# Altium PCB Copy of PCB1.PcbDoc
Units mil, origin at the board's own origin, x right, y up, seen from the top; angles counter-clockwise.
Board outline 3215 x 3375 mil, 2 copper layers (Top Layer, Bottom Layer); 21 components, 30 nets, 101 pads, 4 vias.
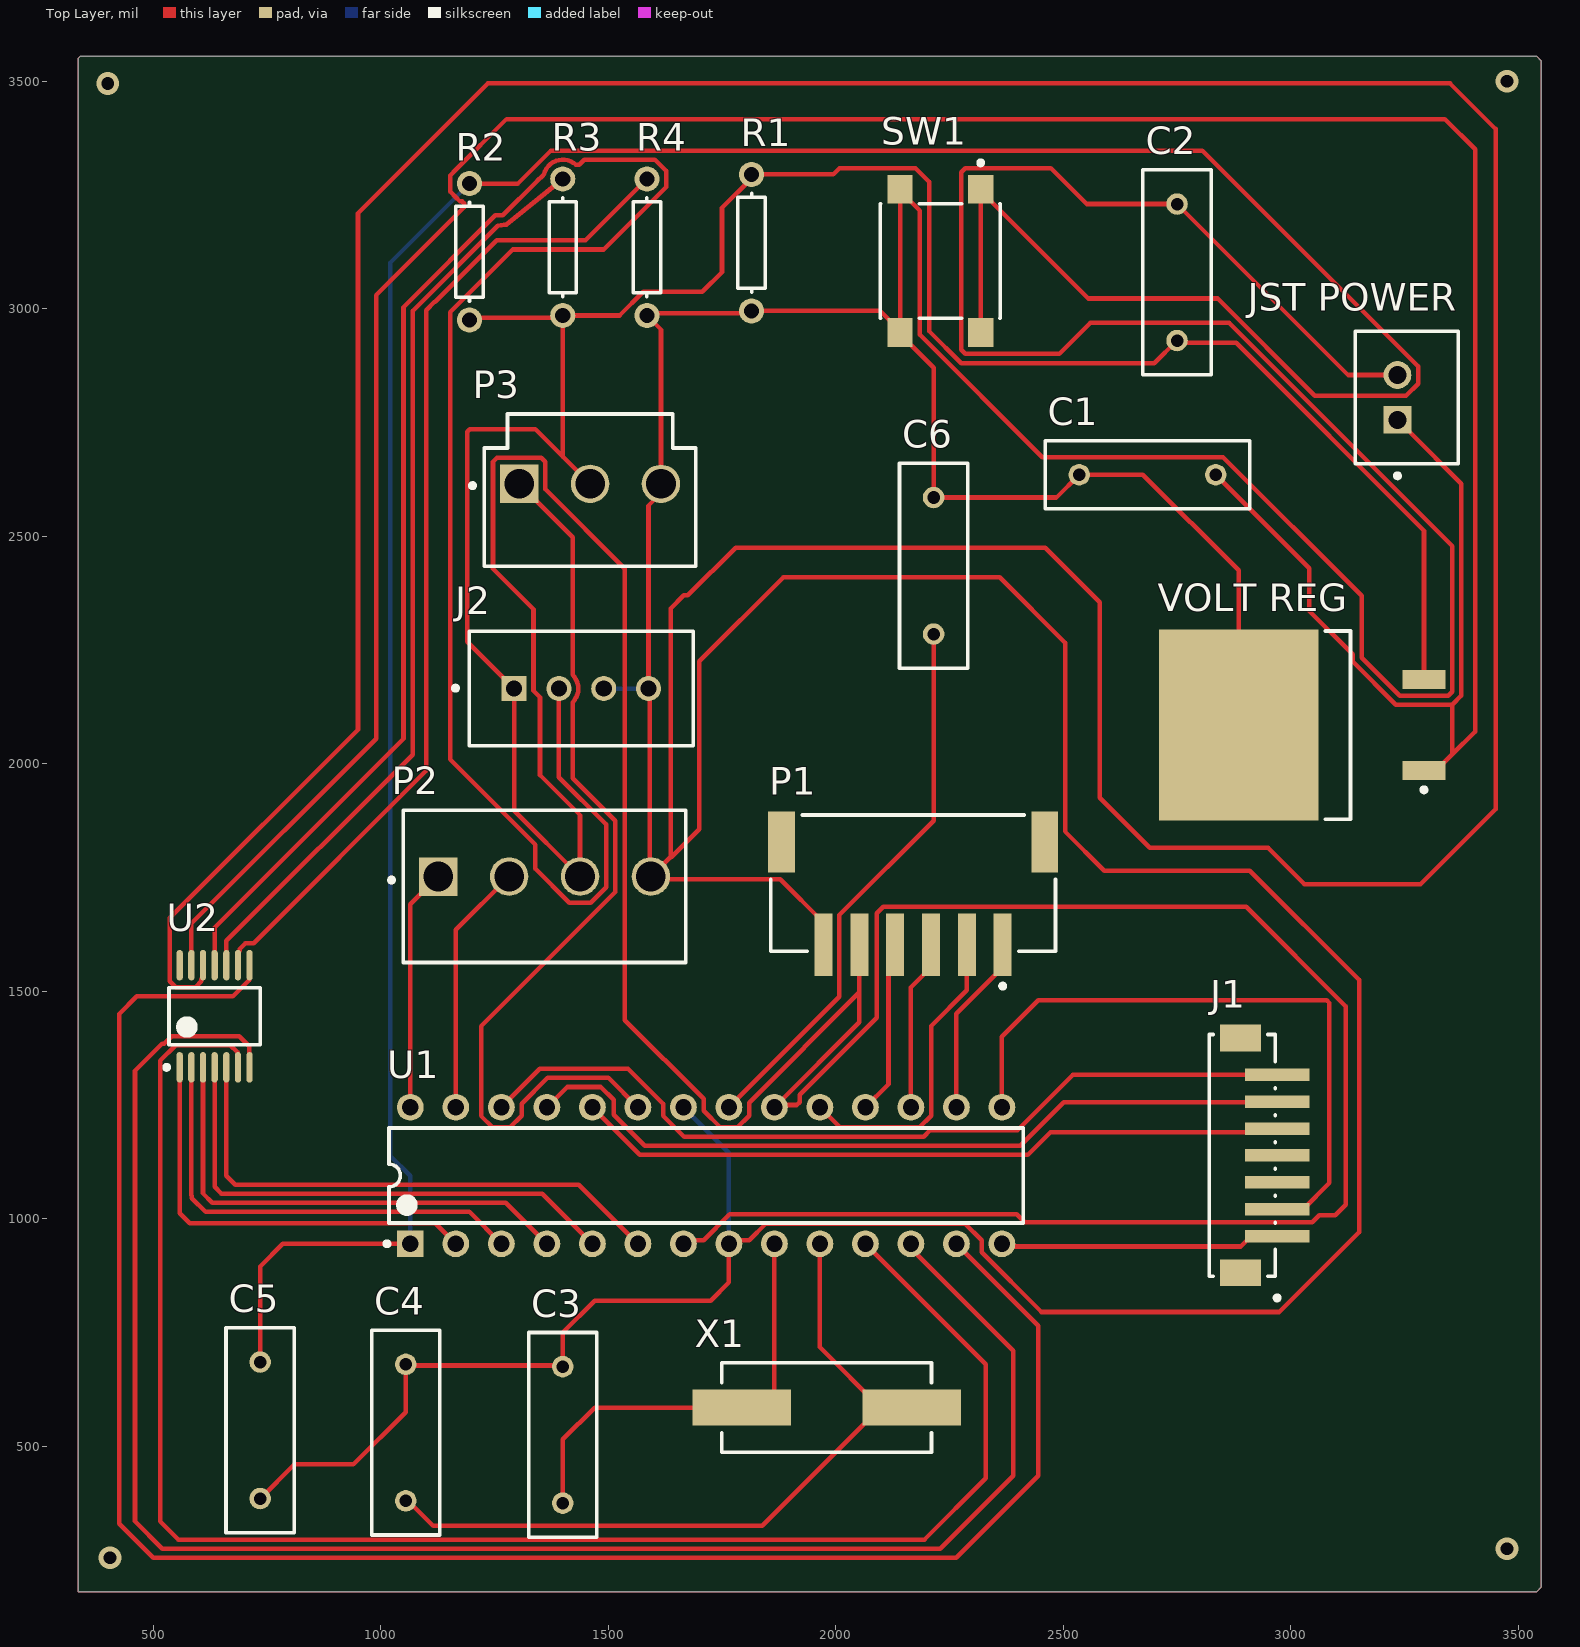
[diagram p0: Top Layer view]
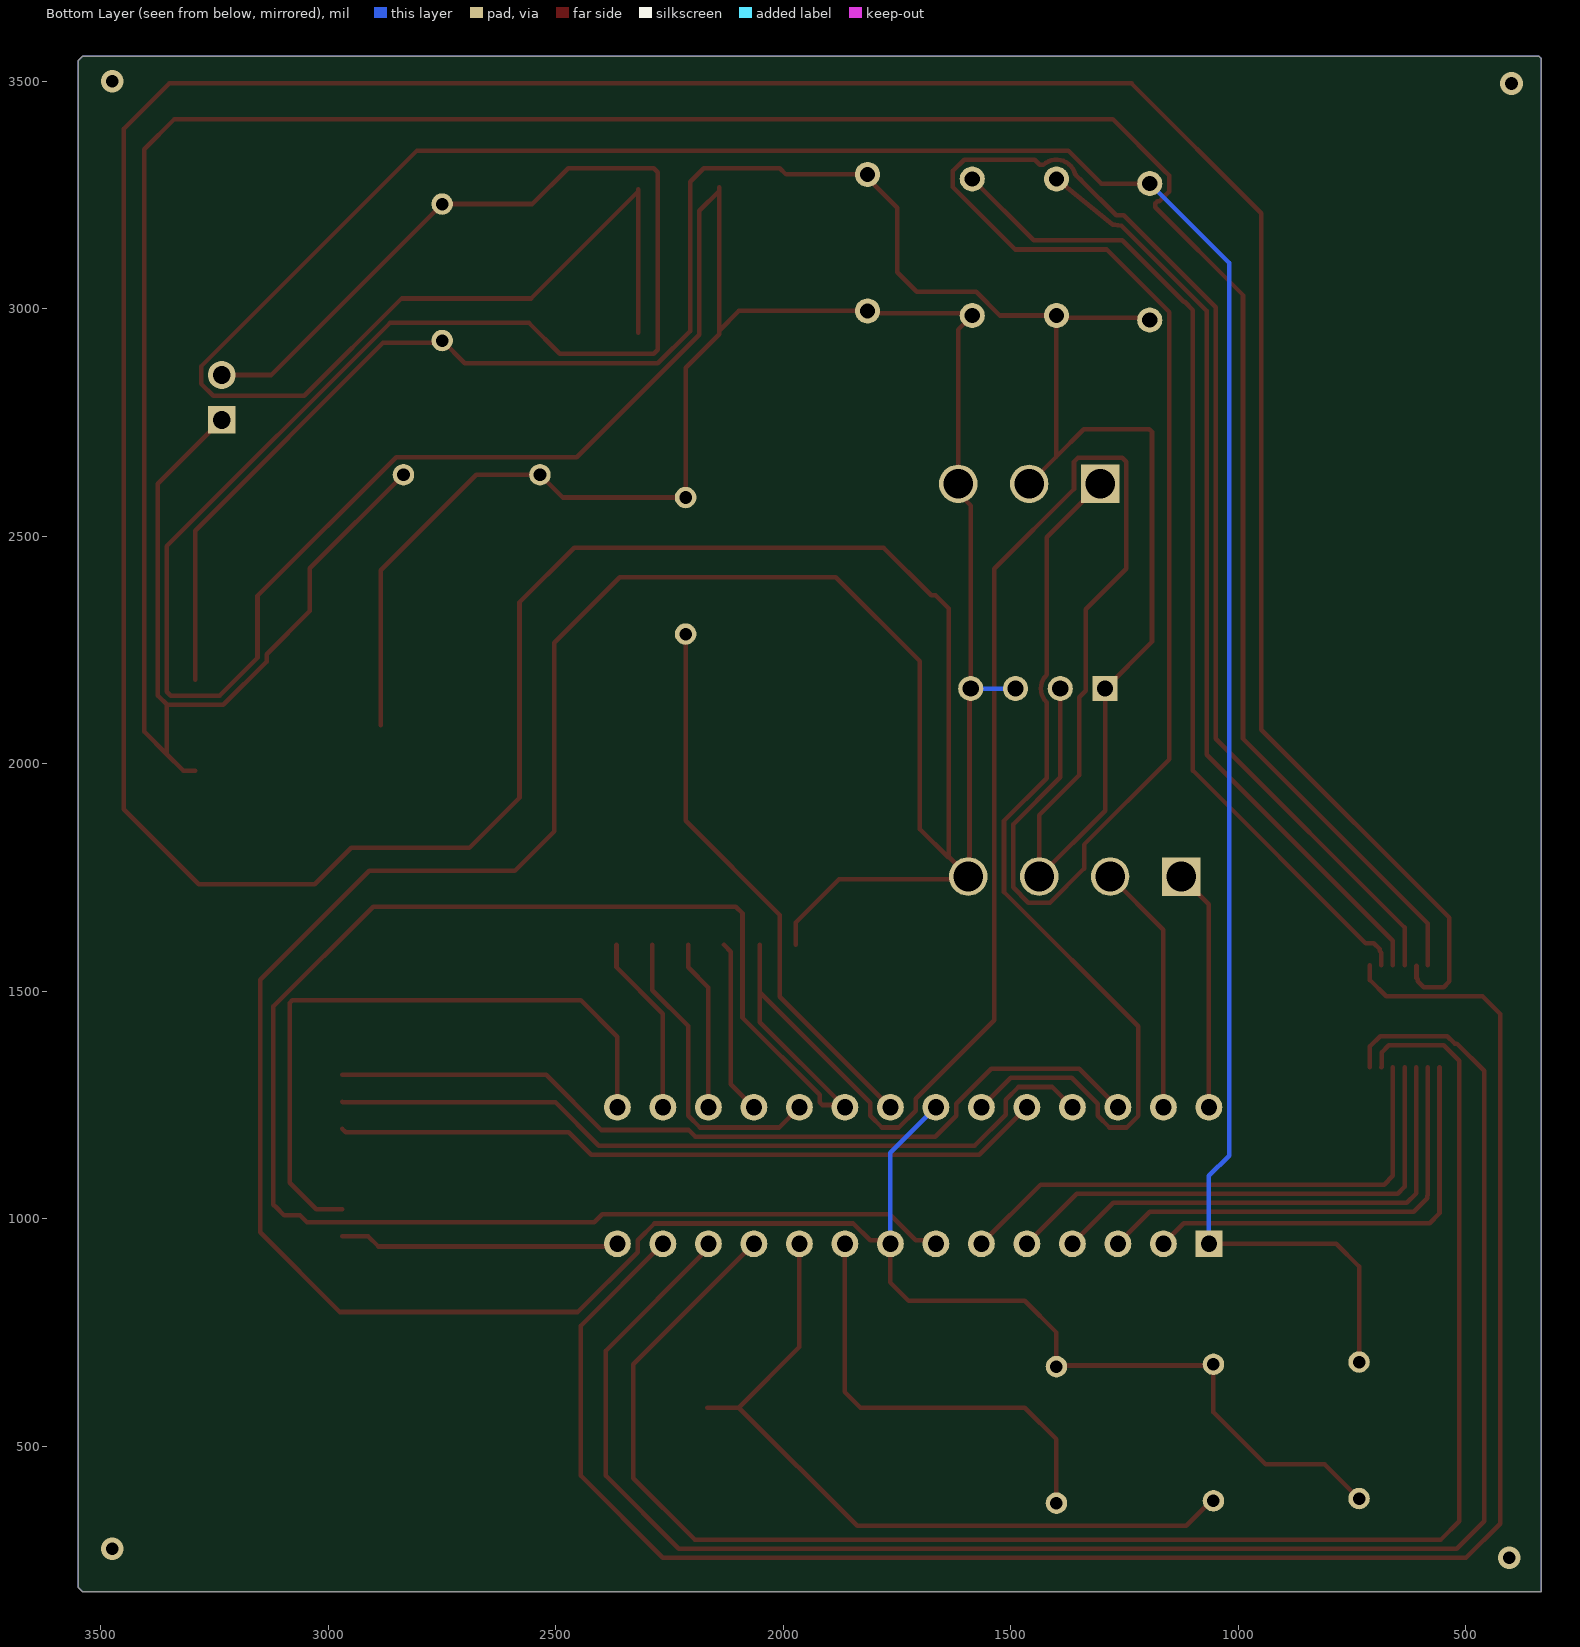
[diagram p1: Bottom Layer view, seen from below]

## Layer stack, top to bottom
Top Solder: solder mask 0.4, Solder Resist, Dk 3.5
Top Layer: signal copper 1.4
Dielectric 1: dielectric 12.6, FR-4, Dk 4.8
Bottom Layer: signal copper 1.4
Bottom Solder: solder mask 0.4, Solder Resist, Dk 3.5

## Board outline
335,180 3540,180 3550,190 3550,3545 3540,3555 340,3555 335,3550

## Design rules (kind name [scope] priority, off if disabled: settings)
Clearance [All] p1: gap=10 ignorepadtopadclearanceinfootprint=FALSE except(0: Arc-Hole Track-Hole SMDPad-Hole THPad-Hole Via-Hole Fill-Hole Poly-Hole Region-Hole Text-Hole)
PolygonConnect [All] p1: connectstyle=Relief reliefconductorwidth=10 reliefentries=4 polygonreliefangle="90 Angle" airgapwidth=10
RoutingVias [All] p1: holewidth=28 width=50 viastyle="Through Hole" minholewidth=28 minwidth=50 maxholewidth=28 maxwidth=50
SolderMaskExpansion [All] p1: expansion=4 istentingtop=FALSE
Width [All] p1: maxlimit=10 minlimit=10 preferedwidth=10
30 further rules are at their usual default settings.

## Components (designator, comment, footprint, x,y, rotation, side; value= is the part's Value field where it differs from the comment)
C1 "Cap" RAD-0.3 2685,2635 r180 top value=330nF
C2 "Cap" RAD-0.3 2750,3080 r270 top value=100nF
C3 "Cap" RAD-0.3 1400,525 r270 top value=22pF
C4 "Cap" RAD-0.3 1055,530 r90 top value=22pF
C5 "Cap" RAD-0.3 735,535 r90 top value=100nF
C6 "Cap" RAD-0.3 2215,2435 r270 top value=100nF
J1 "JST KEYPAD" FP-B7B-ZR-SM4-TF_LF_SN-MFG 2893.23,1139.06 r90 top
J2 "JST AUDIO AMP" FP-B04B-XASK-1_LF_SN-MFG 1440.79,2165 r180 top
"JST POWER" "" FP-B2B-XH-A_LF_SN-MFG 3255,2805 r90 top
P1 "JST SD" JST-S6B-PH-SM4-TB(LF)(SN)_V 2170,1715 r180 top
P2 "JST LCD" JST-B4P-VH(LF)(SN)_V 1360,1695 r0 top
P3 "JST MIC" JST-B3P-VH(LF)(SN)-3_V 1460,2565.79 r0 top
R1 "Res1" AXIAL-0.3 1815,3145 r90 top value=330Ω
R2 "Res1" AXIAL-0.3 1195,3125 r270 top value=10kΩ
R3 "Res1" AXIAL-0.3 1400,3135 r270 top value=10kΩ
R4 "Res1" AXIAL-0.3 1585,3135 r270 top value=10kΩ
SW1 "B3FS-1012P" FP-B3FS-1012P-MFG 2230,3105 r270 top
U1 "ATmega328P-PU" 28P3 1715,1095 r90 top
U2 "DAC-8" SOT402-1_N 635,1445 r90 top
"VOLT REG" "" D2PAK_N 3025,2085 r180 top
X1 "16MHz" FOX-FOXSDLF160-20_V 1980,585 r0 top

## Footprints (in the part's own frame and the unit in brackets; to place one, negate y for a bottom-side part, rotate by r counter-clockwise, add the part's x,y. Pads: shape width x height; smd on the part's side, far side on the other; paste and mask are expansions set on the pad)
28P3 [mm] "28-Pin Plastic Dual In-Line Package (PDIP)"
  rect 1.5x1.5 hole 0.9: 1(-3.81,16.51)
  round 1.5 hole 0.9: 2(-3.81,13.97) 3(-3.81,11.43) 4(-3.81,8.89) 5(-3.81,6.35) 6(-3.81,3.81) 7(-3.81,1.27) 8(-3.81,-1.27) 9(-3.81,-3.81) 10(-3.81,-6.35) 11(-3.81,-8.89) 12(-3.81,-11.43) 13(-3.81,-13.97) 14(-3.81,-16.51) 15(3.81,-16.51) 16(3.81,-13.97) 17(3.81,-11.43) 18(3.81,-8.89) 19(3.81,-6.35) 20(3.81,-3.81) 21(3.81,-1.27) 22(3.81,1.27) 23(3.81,3.81) 24(3.81,6.35) 25(3.81,8.89) 26(3.81,11.43) 27(3.81,13.97) 28(3.81,16.51)
  silkscreen extent -3.93,-17.7 2.65,17.93, body extent -3.6,-17.65 3.6,17.65, height 4.58
AXIAL-0.3 [mm] "Axial Device, Thru-Hole; 2 Leads; 0.3 in Pin Spacing"
  round 1.4 hole 0.85: 1(-3.81,0) 2(3.81,0)
  silkscreen extent -2.77,-0.76 2.77,0.76
D2PAK_N [mm] "D2-PAK, 4-Leads, Body 8.8x10.4mm, Pitch 2.54mm, Lead Span 15.1mm, IPC Medium Density"
  rect 2.4x1.05 smd: 1(-6.8,2.54) 3(-6.8,-2.54)
  rect 8.9x10.65 smd: 2(3.55,0)
  silkscreen extent -6.93,-5.25 -1.3,5.25, body extent -2.7,-5.28 6.3,5.28, height 4.69
FOX-FOXSDLF160-20_V [mm] "SMD, 2-Leads, Body 5x11.7mm, Height 4.5mm"
  rect 5.5x2 smd: 1(-4.75,0) 2(4.75,0)
  silkscreen extent -5.85,-2.5 5.85,2.5, body extent -5.85,-2.5 5.85,2.5, height 4.5
FP-B2B-XH-A_LF_SN-MFG [mm]
  rect 1.55x1.55 hole 1 paste-1000 mask+0: 1(-1.25,0.525)
  round 1.55 hole 1 paste-1000 mask+0: 2(1.25,0.525)
  silkscreen extent -4.5,-2.88 3.7,2.87, body extent -3.8,-2.98 3.8,2.98, height 0.25
FP-B3FS-1012P-MFG [mm]
  rect 1.6x1.4 smd paste+0 mask+0: 1(-4,2.25) 2(4,2.25) 3(-4,-2.25) 4(4,-2.25)
  silkscreen extent -5.6,-3.35 3.2,3.35, body extent -4.9,-3.45 4.9,3.45, height 0.25
FP-B04B-XASK-1_LF_SN-MFG [mm]
  rect 1.4x1.4 hole 0.9 paste-1000 mask+0: 1(3.75,0)
  round 1.4 hole 0.9 paste-1000 mask+0: 2(1.25,0) 3(-1.25,0) 4(-3.75,0)
  silkscreen extent -6.25,-3.2 7.15,3.2, body extent -6.35,-3.3 6.35,3.3, height 0.25
FP-B7B-ZR-SM4-TF_LF_SN-MFG [mm]
  rect 0.7x3.6 smd paste+0 mask+0: 1(-4.5,-1.95) 2(-3,-1.95) 3(-1.5,-1.95) 4(0,-1.95) 5(1.5,-1.95) 6(3,-1.95) 7(4.5,-1.95)
  rect 1.5x2.3 smd paste+0 mask+0: 8(-6.55,0.1) 9(6.55,0.1)
  silkscreen extent -8.07,-2.07 6.75,1.85, body extent -7.4,-3.85 7.4,1.95, height 0.25
JST-B3P-VH(LF)(SN)-3_V [mm] "Connector, 3-Leads, Body 8.5x11.82mm, Pitch 3.96mm"
  rect 2.15x2.15 hole 1.65: 1(-3.96,1.25)
  round 2.15 hole 1.65: 2(0,1.25) 3(3.96,1.25)
  silkscreen extent -6.68,-3.35 5.91,5.15, body extent -5.91,-3.35 5.91,5.15, height 10.9
JST-B4P-VH(LF)(SN)_V [mm] "CONN, 4-Leads, Body 8.5x15.78mm, Pitch 3.96mm"
  rect 2.15x2.15 hole 1.65: 1(-5.94,1.45)
  round 2.15 hole 1.65: 2(-1.98,1.45) 3(1.98,1.45) 4(5.94,1.45)
  silkscreen extent -8.66,-3.35 7.89,5.15, body extent -7.89,-3.35 7.89,5.15, height 10.9
JST-S6B-PH-SM4-TB(LF)(SN)_V [mm] "SMD, 2-Leads, Body 15.9x7.6mm, Pitch 2mm"
  rect 1x3.5 smd: 1(-5,2.875) 2(-3,2.875) 3(-1,2.875) 4(1,2.875) 5(3,2.875) 6(5,2.875)
  rect 1.5x3.4 smd: MP1(-7.35,-2.875) MP2(7.35,-2.875)
  silkscreen extent -7.95,-4.37 7.95,5.3, body extent -7.95,-4.37 7.95,4.23, height 5.6
RAD-0.3 [mm] "Radial Cap, Thru-Hole; 2 Leads; 0.3 in Pin Spacing"
  round 1.2 hole 0.7: 1(-3.81,0) 2(3.81,0)
  silkscreen extent -5.71,-1.91 5.71,1.91
SOT402-1_N [mm] "TSOP, 14-Leads, Body 5x4.4mm, Pitch 0.65mm, IPC Medium Density"
  oval 1.7x0.35 smd: 1(-2.85,1.95) 2(-2.85,1.3) 3(-2.85,0.65) 4(-2.85,0) 5(-2.85,-0.65) 6(-2.85,-1.3) 7(-2.85,-1.95) 8(2.85,-1.95) 9(2.85,-1.3) 10(2.85,-0.65) 11(2.85,0) 12(2.85,0.65) 13(2.85,1.3) 14(2.85,1.95)
  silkscreen extent -2.97,-2.55 1.6,2.8, body extent -2.25,-2.55 2.25,2.55, height 1.1

## Part data
C1 C2 C3 C4 C5 C6: "Capacitor", LatestRevisionDate=17-Jul-2002, LatestRevisionNote="Re-released for DXP Platform.", PackageDescription="Radial Cap, Thru-Hole; 2 Leads; 0.3 in Pin Spacing", PackageReference=RAD-0.3, Published=8-Jun-2000, Publisher="Altium Limited"
J1: library part CMP-17439-000021-1, "CONN HEADER SMD 7POS 1.5MM", Current Rating=1A, Manufacturer=JST, Manufacturer Part Number=B7B-ZR-SM4-TF(LF)(SN)(P), Temperature="-25°C to +85°C", Temperature Range High=+85°C, Temperature Range Low=-25°C, Voltage Rating=50V, Automotive=No, Category=Conn, ComponentLink2Description=Datasheet, ComponentLink2URL=http://www.jst-mfg.com/product/pdf/eng/eZH.pdf, Conn Gender=Male, Conn Orientation=Straight, Contact Material=Tin,Copper, Device Class L1=Connectors, Device Class L2="Headers and Wire Housings", Device Class L3=unset, Digikey Description="CONN HEADER SMD 7POS 1.5MM", Height=5mm, Lead Free=Yes, Number Of Contacts=7, Number Of Rows=1, Octopart=https://octopart.com/b7b-zr-sm4-tf%28lf%29%28sn%29%28p%29-jst-19182389, Package=B7B-ZR-SM4-TF(LF)(SN)(P), Pitch=1.5mm, RoHS=TRUE
J2: library part CMP-17439-000018-1, "CONN HEADER VERT 4POS 2.5MM", Current Rating=3A, Manufacturer=JST, Manufacturer Part Number=B04B-XASK-1(LF)(SN), Temperature="-25°C to +85°C", Temperature Range High=+85°C, Temperature Range Low=-25°C, Voltage Rating=250V, Automotive=No, Category=Conn, ComponentLink2Description=Datasheet, ComponentLink2URL=http://www.jst-mfg.com/product/pdf/eng/eXA1.pdf, Conn Gender=Male, Conn Orientation=Straight, Contact Material=Tin,Copper, Device Class L1=Connectors, Device Class L2="Headers and Wire Housings", Device Class L3=unset, Digikey Description="CONN HEADER VERT 4POS 2.5MM", Height=8.8mm, Lead Free=Yes, Number Of Contacts=4, Number Of Rows=1, Octopart=https://octopart.com/b04b-xask-1%28lf%29%28sn%29-jst-3990149, Package=B04B-XASK-1(LF)(SN), Pitch=2.5mm, RoHS=TRUE
"JST POWER": library part CMP-2000-05888-3, "CONN HEADER VERT 2POS 2.5MM", Color=Natural, Contact Resistance=20mR, Current Rating=3A, Housing Color=White, Insulation Resistance=1GR, Max Operating Temperature=85°C, Max Voltage Rating (AC)=250V, Min Operating Temperature=-25°C, Connector Type="Male Pin", Contact Material=Brass, Contact Plating=Tin, Contact Type="Male Pin", Depth=5.75mm, Fastening Type=Detent, Housing Material=Polyamide, Lead Free="Lead Free", Lead Pitch=2.5mm, Length=7.4mm, Max Current Rating=3A, Max Voltage Rating (DC)=250V, Mount="Through Hole", Number Of Contacts=2, Number of Positions=2, Number Of Rows=1, Orientation=Straight, Packaging=Bulk, Pitch=2.5mm, REACH SVHC="No SVHC", Series=XH, Termination=Solder, Voltage Rating=250V, Voltage Rating (AC)=250V, Wire/Cable Gauge=22AWG
P1: library part CMP-2000-07027-1, "Male Header, Pitch 2 mm, 1 x 6 Position, Height 5.5 mm, -25 to 85 degC", Manufacturer=JST, Package Description="Male Header, Pitch 2 mm, 1 x 6 Position, Height 5.5 mm", Package Reference=S6B-PH-SM4-TB(LF)(SN), Datasheet URL=https://datasheet.ciiva.com/11747/0900766b80df0d9d-11747278.pdf, Datasheet Version=11/2008, Manufacturer URL=http://www.jst.com/home2.html, Mounting Technology=SurfaceMount, No of Positions=6, Pitch=2mm, Style/Orientation=RightAngleHeader/Plug, Termination=Solder, Type=ShroudedHeader
P2: library part CMP-2000-05905-1, "Male Header, Pitch 3.96 mm, 1 x 4 Position, Height 10.9 mm, Tail Length 3.7 mm, -25 to 85 degC, RoHS, Bulk", Manufacturer=JST, Package Description="Male Header, Pitch 3.96 mm, 1 x 4 Position, Height 10.9 mm, Tail Length 3.7 mm", Package Reference=B4P-VH(LF)(SN), Datasheet URL=http://www.jst-mfg.com/product/pdf/eng/eVH.pdf, Datasheet Version=05/2016, Manufacturer URL=http://www.jst.com/home2.html, Mounting Technology=ThroughHole, No of Positions=4, Pitch=3.96mm, Style/Orientation=StraightHeader/Plug, Termination=Solder, Type=LockingHeader
P3: library part CMP-1755-00003-1, "Male Header, Pitch 3.96 mm, 1 x 3 Position, Height 10.9 mm, Tail Length 3.7 mm, -25 to 85 degC, RoHS, Bulk", ComponentLink1Description="Manufacturer URL", ComponentLink1URL=http://www.jst.com/home2.html, ComponentLink2Description=Datasheet, ComponentLink2URL=http://www.jst-mfg.com/product/pdf/eng/eVH.pdf, DatasheetVersion=May-16, PackageDescription="Male Header, Pitch 3.96 mm, 1 x 3 Position, Height 10.9 mm, Tail Length 3.7 mm", PackageReference=B3P-VH(LF)(SN)
R1 R2 R3 R4: "Resistor", LatestRevisionDate=17-Jul-2002, LatestRevisionNote="Re-released for DXP Platform.", PackageDescription="Axial Device, Thru-Hole; 2 Leads; 0.3 in Pin Spacing", PackageReference=AXIAL-0.3, Published=8-Jun-2000, Publisher="Altium Limited"
SW1: library part CMP-08834-000024-1, "SWITCH TACTILE SPST-NO 0.05A 24V", Actuator Color=Beige, Case/Package=SMD/SMT, Contact Resistance=100mR, Current Rating=50mA, Max Operating Temperature=70°C, Max Voltage Rating (DC)=24V, Min Operating Temperature=-20°C, Operating Force=1.47N, Package Quantity=1, Actuator Length=1.7mm, Actuator Type=Standard, Contact Plating=Silver, Depth=8mm, Electrical Life=300000Cycles, Illumination Type=Non-Illuminated, Length=6.3mm, Max Current Rating=50mA, Mechanical Life=300000Cycles, Mount="Surface Mount", Orientation=Straight, Packaging="Tape and Reel", Radiation Hardening=No, RoHS Compliant=Yes, Series=B3FS, Switch Function=Off-Mom, Switch Travel=0.25mm, Termination="Gull Wing", Throw Configuration=SPST, Voltage Rating (DC)=24V, Weight=0.2g
U1: library part CMP-0095-00013-2, "8-bit AVR Microcontroller, 32KB Flash, 1KB EEPROM, 2KB SRAM, 28-pin PDIP, Industrial Grade (-40°C to 85°C)", ComponentLink1Description="Manufacturer URL", ComponentLink1URL=http://www.atmel.com/, ComponentLink2Description="ATmega48A/48PA/88A/88PA/168A/168PA/328/328P Datasheet", ComponentLink2URL=http://www.atmel.com/dyn/resources/prod_documents/8271.pdf, ComponentLink3Description="ATmega48A/48PA/88A/88PA/168A/168PA/328/328P Summary", ComponentLink3URL=http://www.atmel.com/dyn/resources/prod_documents/8271S.pdf, DatasheetVersion="revD, May-2011", PackageDescription="28-lead (0.300\"/7.62mm Wide) Plastic Dual Inline Package (PDIP)", PackageReference=28P3, PackageVersion="revB, Sep-2001", RevisionNote="DatasheetVersion updated. URLs added."
U2: "Generic 8-Bit D/A Converter", Code_JEDEC=MO-153, LatestRevisionDate=29-May-2009, LatestRevisionNote="IPC-7351 Footprint Added.", PackageDescription="14-Pin Thin Small Outline Package 0.65 mm Pitch", PackageReference=SOT402-1, PackageVersion=Mar-2002, Published=8-Jun-2000, Publisher="Altium Limited"
"VOLT REG": library part "Volt Reg", "Voltage Regulator", LatestRevisionDate=29-May-2009, LatestRevisionNote="IPC-7351 Footprint Added.", PackageDescription="3-Pin Transistor Outline Package 2.54 mm Pitch, 15.1 mm Lead Span", PackageReference=D2PAK, Published=24-Mar-1999, Publisher="Altium Limited"
X1: library part CMP-1749-00001-1, "Resistance Weld SMD Crystal, 16 MHz, +/- 30 ppm, 20 pF, -20 to 70 degC, 2-Pin SMD, RoHS, Tape and Reel", Case\Package=SOT-553-6, Max Operating Temperature="150 degC", Max Supply Voltage="3.3 V", Max Supply Voltage (DC)="6 V", Min Operating Temperature="-55 degC", Min Supply Voltage="1.4 V", Min Supply Voltage (DC)="4 V", Output Current="3 mA", Package Quantity=1, ComponentLink1Description="Manufacturer URL", ComponentLink1URL=http://www.foxonline.com/, ComponentLink2Description=Datasheet, ComponentLink2URL=http://foxonline.com/pdfs/hc49sdlf.pdf, DatasheetVersion=Mar-15, Height="0.55 mm", Interface=I2C, Length="1.6 mm", Mount="Surface Mount", PackageDescription="2-Pin Surface Mount Device, Body 5 x 11.7 mm, Height 4.5 mm", PackageReference=FOX-FOXSDLF160-20, Packaging="Cut Tape", Pins=6, Radiation Hardening=No, REACH SVHC="No SVHC", RoHSCompliant=true, Weight="9.9E-05 oz", Width="1.2 mm"

## Via types
v1: diameter 50, hole 28, Top Layer to Bottom Layer, 4 vias

## Nets (pads, with @x,y where several pads share a name; then routed paths per layer and width w, separated by ;. In a path a pad name is that pad's centre, name@x,y a point inside that pad or via, vN(x,y) a via of type N, cw(c..) or ccw(c..) an arc to the next point about the centre after c; other vN are vias at no path point)
+5: "VOLT REG.3" C2.2 J2.1 P1.5 P2.3 P3.2 R1.2 R2.2 R3.2 U1.7 U1.20 | length 12148.7
  Top Layer w10: R2.2 1200,2980 1395,2980 R3.2 ; P3.2 1400,2675 ; U1.7 1672.5,952.5 1709.53,952.5 1766.56,1009.53 2398.14,1009.53 2415.5,992.16 3047.08,992.16 3062.4,1007.49 3097.49,1007.49 3115,1025 3120.86,1030.86 3120.86,1466.57 2901.72,1685.71 2104.73,1685.71 2090,1670.98 2090,1441.72 1920.47,1272.19 1920.47,1255.86 1914.61,1250 U1.20@1870,1250 ; U1.20 U1.20@1870,1250 ; P1.5 2051.89,1497.36 ; 3292.72,2185 3292.72,2512.28 2880,2925 2755,2925 C2.2 2700,2880 2275.86,2880 2205,2950.86 2205,3279.17 2175.19,3308.98 2008.19,3308.98 1994.21,3295 R1.2 1815,3286.9 1750,3221.9 1750,3080 1706.82,3036.82 1576.63,3036.82 1524.81,2985 R3.2 ; 1400,2675 1400,2980 R3.2 ; 1400,2675 1340,2735 1195.86,2735 1190,2729.14 1190,2268.15 J2.1 1293.15,1896.89 P2.3 1437.95,1887.17 1350,1975.12 1350,2146.39 1335.71,2160.68 1335.71,2339.44 1246.77,2428.38 1246.77,2663.54 1255.56,2672.32 1352.63,2672.32 1361.42,2663.54 1361.42,2603.58 1536.54,2428.46 1536.54,1436.44 1709.53,1263.44 1709.53,1237.5 1746.56,1200.47 1783.44,1200.47 1809.53,1226.56 1809.53,1255 2051.89,1497.36 ; U1.20@1870,1250 2051.89,1431.89 2051.89,1497.36
GND: "JST POWER.2" "VOLT REG.2" C1.2 C2.1 C3.1 C4.2 C5.1 C6.1 J2.3 J2.4 P1.6 P2.4 P3.3 R1.1 R4.2 SW1.3 SW1.4 U1.8 U1.22 U2.12 | length 25041.4
  Top Layer w10: U2.12@608.69,1556.18 608.69,1528.88 605.71,1525.9 605.71,1521.56 592.88,1508.74 549.16,1508.74 536.34,1521.56 536.34,1661.34 950,2075 950,3210 1235,3495 3350,3495 3450,3395 3450,1900 3285,1735 3030,1735 2950,1815 2690,1815 2580,1925 2580,2355 2460,2475 1780,2475 1675,2370 1665.86,2370 1637,2341.14 1637,1795.23 P2.4 ; C5.1 810,460 940,460 1055,575 C4.2 1057.5,677.5 1397.5,677.5 C3.1 1400,750 1470,820 1725,820 1765,860 U1.8 1772.5,952.5 1809.53,952.5 1846.56,989.53 2283.44,989.53 2320.47,952.5 2320.47,926.56 2452.03,795 2975,795 3150,970 3150,1525 2910,1765 2590,1765 2503.9,1851.1 2503.9,2266.1 2360,2410 1885,2410 1700,2225 1700,1855.86 1638.18,1794.04 ; P1.6 1973.15,1651.02 1877.91,1746.26 1599.68,1746.26 P2.4 ; SW1.3@2141.42,3266.42 SW1.3 SW1.3@2141.42,3258.54 ; 2885.24,2085 2885.24,2424.76 2675,2635 C1.2 2485,2585 C6.1 2215,2870 2141.42,2943.58 SW1.4 SW1.4@2141.42,2951.46 ; 3234.33,2854.21 3125.79,2854.21 C2.1 2551.85,3230 2472.88,3308.98 2284.81,3308.98 2276.02,3300.19 2276.02,2909.81 2284.81,2901.02 2491.6,2901.02 2559.2,2968.62 2864.66,2968.62 3354.96,2478.32 3354.96,2158.12 3346.17,2149.33 3239.26,2149.33 3155.83,2232.76 3155.83,2368.79 2851,2673.62 2453.95,2673.62 2185,2942.57 2185,3214.96 SW1.3@2141.42,3258.54 ; P2.4 1591.14,1754.8 1591.14,2162.28 J2.4 1588.43,2567.32 1615.91,2594.8 P3.3 1615.91,2954.09 R4.2 1590,2990 1810,2990 R1.1 2097.88,2995 SW1.4@2141.42,2951.46 ; SW1.4@2141.42,2951.46 SW1.3@2141.42,3258.54
  Bottom Layer w10: J2.3 J2.4 ; U1.22 1765,1145 U1.8
NetC3_2: C3.2 U1.9 X1.1 | length 973.9
  Top Layer w10: C3.2 1400,515 1470,585 X1.1 1830.63,585 1865,619.37 U1.9
NetC4_1: C4.1 U1.10 X1.2 | length 1657.6
  Top Layer w10: C4.1 1060,380 1115,325 1838.11,325 X1.2@2098.11,585 ; U1.10 1965,718.11 X1.2@2098.11,585 ; X1.2 X1.2@2098.11,585
NetC5_2: C5.2 R2.1 SW1.1 SW1.2 U1.1 | length 6804.2
  Top Layer w10: C5.2 735,895 785,945 U1.1 ; R2.1 1301.53,3275 1374.09,3347.56 2805.35,3347.56 3279.84,2873.06 3279.84,2835.36 3253.18,2808.7 3052.87,2808.7 2839.23,3022.34 2554.78,3022.34 SW1.1@2318.58,3258.54 ; SW1.2 SW1.1@2318.58,3258.54 ; SW1.1 SW1.1@2318.58,3258.54
  Bottom Layer w10: U1.1 1065,1094.22 1020.47,1138.75 1020.47,3100.47 R2.1
NetC6_2: C6.2 U1.21 | length 1226.4
  Top Layer w10: U1.21 2007.84,1487.84 2007.84,1667.55 2215,1874.72 C6.2
NetJ1_1: J1.1 U1.14 | length 617
  Top Layer w10: U1.14 2371.03,938.97 2889.99,938.97 2912.91,961.89 J1.1
NetJ1_2: J1.2 U1.15 | length 1444.8
  Top Layer w10: U1.15 2365,1400 2445,1480 3079.14,1480 3085,1474.14 3085,1078.86 3027.09,1020.94 J1.2
NetJ1_5: J1.5 U1.24 | length 1572.2
  Top Layer w10: U1.24 1569.53,1140.47 2422.38,1140.47 2471.91,1190 2961.89,1190 J1.5
NetJ1_6: J1.6 U1.25 | length 1736
  Top Layer w10: U1.25 1409.53,1289.53 1483.44,1289.53 1511.72,1261.25 1511.72,1228.75 1580,1160.47 2405.47,1160.47 2500.87,1255.87 2968.7,1255.87 J1.6
NetJ1_7: J1.7 U1.26 | length 1873.2
  Top Layer w10: U1.26 1349.53,1329.53 1543.44,1329.53 1620.47,1252.5 1620.47,1226.56 1666.56,1180.47 2193.36,1180.47 2207.89,1195 2400,1195 2521.22,1316.22 J1.7
NetJ2_2: J2.2 U2.11 | length 4954.5
  Top Layer w10: U2.11 635,1640 1050,2055 1050,3003.28 1251.72,3205 1268.43,3205 1344.12,3280.68 cw(c1372.51,3252.51) 1344.34,3280.9 1355.94,3292.51 1356.04,3292.51 1356.8,3293.28 1358.67,3295.14 cw(c1400,3285) 1428.67,3316.45 1432.31,3316.45 1436.45,3316.45 1447.56,3327.56 1602.63,3327.56 1627.56,3302.63 1627.56,3267.37 1490.19,3130 1289.81,3130 1152.44,2992.63 1152.44,2009.31 1339.37,1822.38 1339.37,1769.6 1414.21,1694.76 1461.7,1694.76 1495.27,1728.34 1495.27,1866.54 1391.57,1970.24 J2.2
NetP1_1: P1.1 U1.16 | length 399
  Top Layer w10: U1.16 2265,1450.75 2366.85,1552.6 P1.1
NetP1_2: P1.2 U1.19 | length 681.6
  Top Layer w10: U1.19 2009.53,1200.47 2183.44,1200.47 2209.53,1226.56 2209.53,1423.56 2288.11,1502.14 P1.2
NetP1_3: P1.3 U1.17 | length 375.2
  Top Layer w10: U1.17 2165,1508.23 2209.37,1552.6 P1.3
NetP1_4: P1.4 U1.18 | length 384
  Top Layer w10: U1.18 2115.94,1295.94 2115.94,1587.12 P1.4
NetP2_1: P2.1 U1.28 | length 532.4
  Top Layer w10: U1.28 1065,1690.94 P2.1
NetP2_2: P2.2 U1.27 | length 555.6
  Top Layer w10: U1.27 1165,1635.04 P2.2
NetP3_1: P3.1 U1.23 | length 2047.5
  Top Layer w10: P3.1 1421.67,2497.43 1421.67,2195.09 cw(c1391.57,2165) 1421.67,2134.91 1421.67,1968.43 1515.27,1874.82 1515.27,1718.09 1220.47,1423.29 1220.47,1225.86 1245.86,1200.47 1283.44,1200.47 1309.53,1226.56 1309.53,1252.5 1366.56,1309.53 1500.47,1309.53 U1.23
NetR3_1: R3.1 U2.10 | length 2050.5
  Top Layer w10: U2.10 660.59,1610.59 1070,2020 1070,2995 1257.07,3182.07 1276.72,3185 R3.1
NetR4_1: R4.1 U2.9 | length 2225.9
  Top Layer w10: U2.9 686.18,1584.8 689.88,1588.5 689.88,1592.85 702.7,1605.67 720.67,1605.67 1100,1985 1100,2996.72 1118.28,3015 1120,3015 1255,3150 1450,3150 R4.1
NetU1_2: U1.2 U2.1 | length 955.5
  Top Layer w10: U2.1 558.23,1011.77 580,990 1120,990 U1.2
NetU1_3: U1.3 U2.2 | length 1009.7
  Top Layer w10: U2.2 583.82,1051.18 585,1050 585,1045 615,1015 1195,1015 U1.3
NetU1_4: U1.4 U2.3 | length 1078.6
  Top Layer w10: U2.3 609.41,1055.59 630,1035 1275,1035 U1.4
NetU1_5: U1.5 U2.4 | length 1144.6
  Top Layer w10: U2.4 635,1070 650,1055 1355,1055 U1.5
NetU1_6: U1.6 U2.5 | length 1204.7
  Top Layer w10: U2.5 660.59,1094.41 680,1075 1435,1075 U1.6
NetU1_11: U1.11 U2.6 | length 3748.5
  Top Layer w10: U2.6 685.46,1333.52 685.46,1365.46 669.66,1381.26 549.16,1381.26 515,1347.1 515,335 555,295 2195,295 2330,430 2330,680 2255,755 U1.11
NetU1_12: U1.12 U2.7 | length 3952.7
  Top Layer w10: U2.7 711.05,1333.52 711.05,1378.95 688.74,1401.26 540.88,1401.26 524.62,1385 520,1385 460,1325 460,335 520,275 2230,275 2390,435 2390,710 2165,935 U1.12
NetU1_13: U1.13 U2.8 | length 4180.1
  Top Layer w10: U2.8 711.05,1556.48 711.05,1524.54 675.25,1488.74 463.74,1488.74 425,1450 425,330 500,255 2265,255 2445,435 2445,765 U1.13
VCC: "JST POWER.1" "VOLT REG.1" C1.1 U2.13 | length 7353.3
  Top Layer w10: U2.13 583.82,1648.82 990,2055 990,3030 1183.09,3223.09 1183.09,3227.23 1183.09,3231.37 1180.16,3234.3 1178.82,3235.64 1174.17,3235.64 1164.91,3244.91 1152.44,3257.37 1152.44,3275 1152.44,3292.63 1164.91,3305.09 1276.53,3416.72 3338.28,3416.72 3405,3350 3405,2070.71 3355,2020.71 ; C1.1 3040.69,2429.31 3040.69,2335.6 3135.83,2240.46 3135.83,2224.47 3230.97,2129.33 3354.46,2129.33 3374.96,2149.83 3374.96,2615.16 3259.84,2730.28 3234.33,2755.79 ; 3292.72,1985 3319.29,1985 3355,2020.71 ; 3355,2129.87 3355,2020.71
pads on no net: J1.3 J1.4 J1.8 J1.9 P1.MP1 P1.MP2 U2.14
copper on no net:
  other v1: 405,255 3475,275 400,3495 3475,3500

## Other copper
Multi-Layer:
  the board outline again, w1.97